# Altium PCB MecaVac NEW.PcbDoc
Units mm, origin at the board's own origin, x right, y up, seen from the top; angles counter-clockwise.
Board outline 120 x 80 mm, 2 copper layers (Top Layer, Bottom Layer), stack 1.56 mm thick; 84 components, 51 nets, 295 pads, 0 vias.
Unrouted connection lines stored in the file: 224.
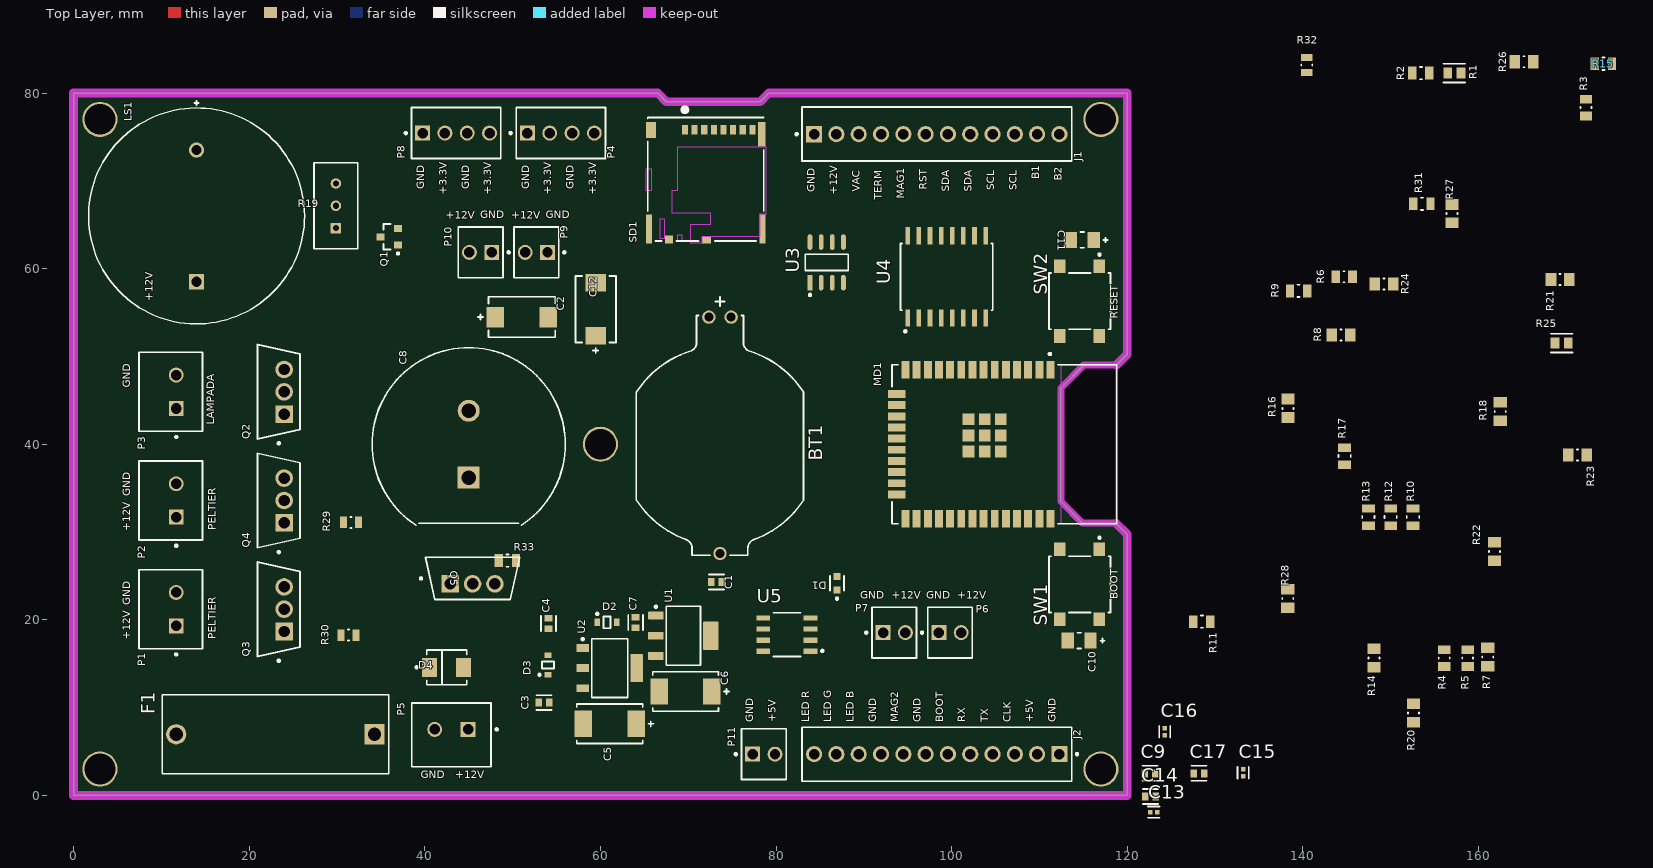
[diagram p0: Top Layer view]
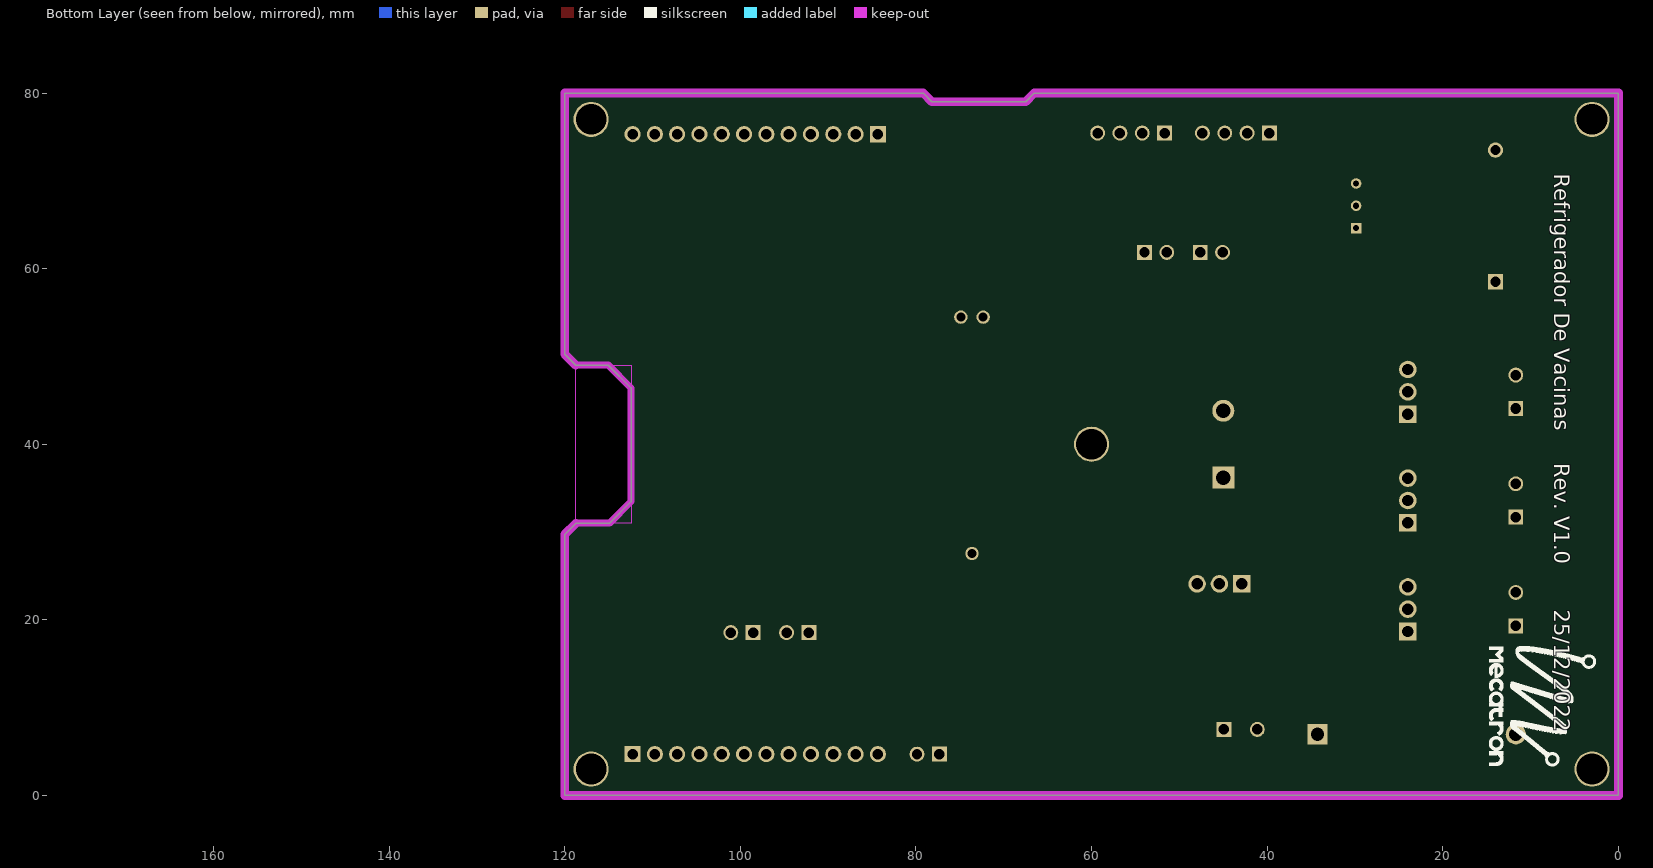
[diagram p1: Bottom Layer view, seen from below]

## Layer stack, top to bottom
Top Solder: solder mask 0.02, Solder Resist, Dk 3.5
Top Layer: signal copper 0.3
Dielectric 1: dielectric 0.96, FR-4, Dk 4.8
Bottom Layer: signal copper 0.3
Bottom Solder: solder mask 0.02, Solder Resist, Dk 3.5

## Board outline
112.45,33.473 114.923,31 118.733,31 120,29.733 120,0 0,0 0,80 66.523,80 67.494,79 78.194,79 79.172,80 120,80 120,50.25 118.75,49 115.04,49 112.45,46.41

## Design rules (kind name [scope] priority, off if disabled: settings)
Clearance [All] p1: gap=0.254 ignorepadtopadclearanceinfootprint=FALSE except(0: Arc-Hole Track-Hole SMDPad-Hole THPad-Hole Via-Hole Fill-Hole Poly-Hole Region-Hole Text-Hole)
PolygonConnect [All] p1: connectstyle=Relief reliefconductorwidth=0.254 reliefentries=4 polygonreliefangle="90 Angle" airgapwidth=0.254
RoutingVias [All] p1: holewidth=1 width=1.3 viastyle="Through Hole" minholewidth=0.3 minwidth=0.7 maxholewidth=2 maxwidth=3
SolderMaskExpansion [All] p1: expansion=0.102 istentingtop=FALSE
Width [All] p1: maxlimit=2.5 minlimit=0.254 preferedwidth=0.9 minimp=50.000000 maximp=50.000000 favimp=50.000000
30 further rules are at their usual default settings.

## Components (designator, comment, footprint, x,y, rotation, side; value= is the part's Value field where it differs from the comment)
BT1 "120591-1" TECO-120591-1-2_V 73.619,41.016 r270 top
C1 "C0603C471J5GACTU" FP-C0603C-CF-MFG 73.228,24.308 r0 top value="470 pF"
C2 "T491D476K025AT" FP-T491D476K025AT-MFG 51.054,54.483 r180 top
C3 "C0603C471J5GACTU" FP-C0603C-CF-MFG 53.569,10.566 r180 top value="470 pF"
C4 "C0603C471J5GACTU" FP-C0603C-CF-MFG 54.077,19.583 r90 top value="470 pF"
C5 "47uF" FP-TAJD-MFG 61.062,8.153 r0 top
C6 "47uF" FP-TAJD-MFG 69.698,11.836 r0 top
C7 "C0603C471J5GACTU" FP-C0603C-CF-MFG 64.008,19.685 r90 top value="470 pF"
C8 "Super Capacitor 1F 5.5V" FP-FR0H105ZF-MFG 45,40 r90 top value=1F
C9 "C0603C104K5RACTU" FP-C0603C-CF-MFG 122.58,2.515 r0 top value="0.10 μF"
C10 "TAJA104K035RNJ" FP-TAJA-MFG 114.529,17.628 r0 top
C11 "TAJA104K035RNJ" FP-TAJA-MFG 114.884,63.271 r0 top
C12 "T491D476K025AT" FP-T491D476K025AT-MFG 59.461,55.372 r270 top
C13 "C0402C105K8PACTU" FP-C0402C105K8PACTU-MFG 123.038,-1.905 r180 top
C14 "C0603C104K5RACTU" FP-C0603C-CF-MFG 122.657,-0.127 r0 top value="0.10 μF"
C15 "C0402C105K8PACTU" FP-C0402C105K8PACTU-MFG 133.198,2.565 r90 top
C16 "C0402C105K8PACTU" FP-C0402C105K8PACTU-MFG 124.282,7.245 r90 top
C17 "C0603C104K5RACTU" FP-C0603C-CF-MFG 128.194,2.515 r0 top value="0.10 μF"
D1 "LTST-C191TBKT" FP-LTST-C191TBKT-MFG 86.944,24.167 r90 top
D2 "BAT54HT1G" ONSC-SOD-323-2-477-02_V 60.757,19.71 r0 top
D3 "BAT54HT1G" ONSC-SOD-323-2-477-02_V 54.026,14.859 r90 top
D4 "TVS-15V" FP-95401-MFG 42.494,14.58 r0 top
F1 "64600001223" FP-64600001223-MFG 22.984,6.96 r180 top
J1 "22-27-2121" FP-22-27-2121-MFG 98.313,75.331 r180 top
J2 "22-27-2121" FP-22-27-2121-MFG 98.313,4.679 r0 top
LS1 "PKB24SPCH3601-B0" FP-PKB24SPCH3601-B0-MFG 14,66 r90 top
MD1 "ESP32-WROOM-32D" FP-ESP32-WROOM-32D-MFG 106,40 r270 top
P1 "Peltier 1" PHOE-1803426_V 11.684,21.209 r90 top
P2 "Peltier 2" PHOE-1803426_V 11.684,33.591 r90 top
P3 "Lâmpada" PHOE-1803426_V 11.684,45.974 r90 top
P4 "22-27-2041" MOLX-22-27-2041_V 55.499,75.438 r180 top
P5 "Power" PHOE-1803426_V 43.028,7.518 r180 top
P6 "22-27-2021" MOLX-22-27-2021_V 99.822,18.542 r0 top
P7 "22-27-2021" MOLX-22-27-2021_V 93.472,18.542 r0 top
P8 "22-27-2041" MOLX-22-27-2041_V 43.561,75.438 r180 top
P9 "22-27-2021" MOLX-22-27-2021_V 52.705,61.849 r180 top
P10 "22-27-2021" MOLX-22-27-2021_V 46.355,61.849 r180 top
P11 "22-27-2021" MOLX-22-27-2021_V 78.613,4.699 r0 top
Q1 "BC846BLT1G" ONSC-SOT-23-3-318-08_V 35.941,63.627 r180 top
Q2 "IRF1404PBF" FP-PG-TO220-3-MFG 23.368,45.974 r180 top
Q3 "IRF1404PBF" FP-PG-TO220-3-MFG 23.368,21.209 r180 top
Q4 "IRF1404PBF" FP-PG-TO220-3-MFG 23.368,33.591 r180 top
Q5 "IRF1404PBF" FP-PG-TO220-3-MFG 45.441,24.715 r90 top
R1 "ERA6AEB102V" FP-ERA6A-IPC_C 157.251,82.271 r0 top
R2 "CRCW0805100KFKEA" FP-CRCW0805-e3-MFG 153.441,82.271 r0 top
R3 "CRCW08054K70FKEA" FP-CRCW0805-e3-IPC_B 172.263,78.337 r270 top
R4 "CRCW08054K70FKEA" FP-CRCW0805-e3-IPC_B 156.108,15.646 r90 top
R5 "CRCW08054K70FKEA" FP-CRCW0805-e3-IPC_B 158.775,15.646 r90 top
R6 "CRCW08054K70FKEA" FP-CRCW0805-e3-IPC_B 144.704,59.08 r0 top
R7 "CRCW080510K0FKEA" FP-CRCW0805-e3-IPC_A 161.061,15.773 r90 top
R8 "CRCW080510K0FKEA" FP-CRCW0805-e3-IPC_A 144.364,52.451 r0 top
R9 "CRCW080547K0FKEA" FP-CRCW0805-e3-MFG 139.522,57.455 r0 top
R10 "CRCW080547K0FKEA" FP-CRCW0805-e3-MFG 152.552,31.699 r270 top
R11 "CRCW080547K0FKEA" FP-CRCW0805-e3-MFG 128.499,19.787 r180 top
R12 "CRCW080547K0FKEA" FP-CRCW0805-e3-MFG 150.012,31.699 r270 top
R13 "CRCW0805220RFKEA" FP-CRCW0805-e3-MFG 147.472,31.699 r270 top
R14 "CRCW080510K0FKEA" FP-CRCW0805-e3-IPC_A 148.107,15.646 r90 top
R15 "CRCW0805220RFKEA" FP-CRCW0805-e3-MFG 174.244,83.337 r180 top
R16 "CRCW080510K0FKEA" FP-CRCW0805-e3-IPC_A 138.328,44.094 r270 top
R17 "CRCW0805220RFKEA" FP-CRCW0805-e3-MFG 144.755,38.633 r270 top
R18 "CRCW080510K0FKEA" FP-CRCW0805-e3-IPC_A 162.484,43.739 r270 top
R19 "3296W-1-202LF" FP-3296W-MFG 29.87,67.158 r0 top
R20 "CRCW080510K0FKEA" FP-CRCW0805-e3-IPC_A 152.603,9.389 r90 top
R21 "CRCW080510K0FKEA" FP-CRCW0805-e3-IPC_A 169.316,58.75 r180 top
R22 "CRCW080510K0FKEA" FP-CRCW0805-e3-IPC_A 161.823,27.762 r90 top
R23 "CRCW080510K0FKEA" FP-CRCW0805-e3-IPC_A 171.298,38.76 r0 top
R24 "CRCW080510K0FKEA" FP-CRCW0805-e3-IPC_A 149.25,58.242 r180 top
R25 "ERA6AEB102V" FP-ERA6A-IPC_C 169.494,51.511 r180 top
R26 "CRCW080510K0FKEA" FP-CRCW0805-e3-IPC_A 165.176,83.566 r0 top
R27 "CRCW080510K0FKEA" FP-CRCW0805-e3-IPC_A 156.997,66.254 r270 top
R28 "CRCW080510K0FKEA" FP-CRCW0805-e3-IPC_A 138.278,22.428 r270 top
R29 "CRCW080530R0JNEA" FP-CRCW0805-e3-IPC_C 31.572,31.09 r180 top
R30 "CRCW080530R0JNEA" FP-CRCW0805-e3-IPC_C 31.318,18.263 r0 top
R31 "CRCW0805100KFKEA" FP-CRCW0805-e3-MFG 153.568,67.386 r0 top
R32 "CRCW0805220KFKEA" FP-CRCW0805-e3-IPC_C 140.462,83.21 r270 top
R33 "CRCW0805100KFKEA" FP-CRCW0805-e3-MFG 49.403,26.746 r0 top
SD1 "503398-1892" MOLX-503398-1892_V 72,69.53 r0 top
SW1 "BOOT" FP-B3S-1000P-MFG 114.59,24.046 r270 top
SW2 "RESET" FP-B3S-1000P-MFG 114.59,56.299 r270 top
U1 "LM1117IMP-3.3/NOPB" DCY0004A_N 69.444,18.186 r0 top
U2 "LM1117MPX-5.0/NOPB" DCY0004A_L 61.062,14.503 r0 top
U3 "AT24C32D-SSHM-T" FP-C04-057-SN-IPC_C 85.776,60.711 r90 top
U4 "DS3231SN#T&R" FP-W16-H2-MFG 99.441,59.055 r90 top
U5 "TC4424AVOA713" FP-C04-057-OA-MFG 81.229,18.313 r180 top

## Footprints (in the part's own frame and the unit in brackets; to place one, negate y for a bottom-side part, rotate by r counter-clockwise, add the part's x,y. Pads: shape width x height; smd on the part's side, far side on the other; paste and mask are expansions set on the pad)
DCY0004A_L [mm] "SOT223, 4-Leads, Body 6.7x3.7mm, Pitch 2.3mm, IPC High Density"
  rrect11% 1.45x0.9 smd: 1(-3.075,2.3) 2(-3.075,0) 3(-3.075,-2.3)
  rrect7% 1.45x3.15 smd: 4(3.075,0)
  silkscreen extent -3.2,-3.35 2.05,3.42, body extent -3.5,-3.25 3.5,3.25, height 1.62
DCY0004A_N [mm] "SOT223, 4-Leads, Body 6.7x3.7mm, Pitch 2.3mm, IPC Medium Density"
  rrect11% 1.75x0.9 smd: 1(-3.125,2.3) 2(-3.125,0) 3(-3.125,-2.3)
  rrect6% 1.75x3.2 smd: 4(3.125,0)
  silkscreen extent -3.25,-3.35 1.95,3.42, body extent -3.5,-3.25 3.5,3.25, height 1.62
FP-22-27-2121-MFG [mm]
  rect 1.84x1.84 hole 1.19 paste-1000 mask+0: 1(13.97,0.02)
  round 1.84 hole 1.19 paste-1000 mask+0: 2(11.43,0.02) 3(8.89,0.02) 4(6.35,0.02) 5(3.81,0.02) 6(1.27,0.02) 7(-1.27,0.02) 8(-3.81,0.02) 9(-6.35,0.02) 10(-8.89,0.02) 11(-11.43,0.02) 12(-13.97,0.02)
  silkscreen extent -15.37,-3.07 16.09,3.08, body extent -15.47,-3.18 15.47,3.18, height 0.25
FP-3296W-MFG [mm]
  rect 1.2x1.2 hole 0.7 paste-1000 mask+0: 1(0.005,-2.54)
  round 1.2 hole 0.7 paste-1000 mask+0: 2(0.005,0) 3(0.005,2.54)
  silkscreen extent -2.48,-4.89 2.48,4.89, body extent -2.58,-4.99 2.58,4.99, height 0.25
FP-95401-MFG [mil]
  rect 67.5x86 smd paste+0 mask+0: 1(-76.25,0) 2(76.25,0)
  silkscreen extent -140,-78 90,78, body extent -114,-81 114,81, height 10
FP-64600001223-MFG [mm]
  rect 2.3x2.3 hole 1.5 paste-1000 mask+0: 1(-11.3,0)
  round 2.3 hole 1.5 paste-1000 mask+0: 2(11.3,0)
  silkscreen extent -12.9,-4.5 12.9,4.5, body extent -13,-4.6 13,4.6, height 0.25
FP-B3S-1000P-MFG [mm]
  rect 1.55x1.3 smd paste+0 mask+0: 1(-3.975,2.25) 2(3.975,2.25) 3(-3.975,-2.25) 4(3.975,-2.25)
  silkscreen extent -5.42,-3.5 3.2,3.5, body extent -4.85,-3.6 4.85,3.6, height 0.25
FP-C04-057-OA-MFG [mm]
  rect 1.55x0.6 smd paste+0 mask+0: 1(-2.7,1.905) 2(-2.7,0.635) 3(-2.7,-0.635) 4(-2.7,-1.905) 5(2.7,-1.905) 6(2.7,-0.635) 7(2.7,0.635) 8(2.7,1.905)
  silkscreen extent -4.18,-2.5 1.55,2.5, body extent -3.57,-2.75 3.57,2.75, height 0.25
FP-C04-057-SN-IPC_C [mm]
  rect 1.777x0.542 smd paste+0 mask+0: 1(-2.318,1.905)
  rrect100% 1.777x0.542 smd paste+0 mask+0: 2(-2.318,0.635) 3(-2.318,-0.635) 4(-2.318,-1.905) 5(2.318,-1.905) 6(2.318,-0.635) 7(2.318,0.635) 8(2.318,1.905)
  silkscreen extent -3.83,-2.45 0.93,2.45, body extent -3.31,-2.55 3.31,2.55, height 0.25
FP-C0402C105K8PACTU-MFG [mm]
  rect 0.52x0.52 smd paste+0 mask+0: 1(-0.4,0) 2(0.4,0)
  silkscreen extent -0.67,-0.64 0.67,0.64, body extent -0.8,-0.4 0.8,0.4, height 0.25
FP-C0603C-CF-MFG [mm]
  rect 0.75x0.9 smd paste+0 mask+0: 1(-0.6,0) 2(0.6,0)
  silkscreen extent -0.87,-0.85 0.88,0.85, body extent -1.2,-0.6 1.2,0.6, height 0.25
FP-CRCW0805-e3-IPC_A [mil]
  rect 47.5x59.38 smd paste+0 mask+0: 1(-41.37,0) 2(41.37,0)
  silkscreen extent -3,-25 3,25, body extent -85,-49 85,49, height 10
FP-CRCW0805-e3-IPC_B [mm]
  rect 1.007x1.408 smd paste+0 mask+0: 1(-0.951,0) 2(0.951,0)
  silkscreen extent -0.07,-0.62 0.07,0.62, body extent -1.7,-0.95 1.7,0.95, height 0.25
FP-CRCW0805-e3-IPC_C [mil]
  rect 31.75x51.5 smd paste+0 mask+0: 1(-33.5,0) 2(33.5,0)
  silkscreen extent -3,-25 3,25, body extent -53,-31 53,31, height 10
FP-CRCW0805-e3-MFG [mm]
  rect 0.95x1.45 smd paste+0 mask+0: 1(-0.975,0) 2(0.975,0)
  silkscreen extent -0.13,-0.7 0.13,0.7, body extent -1.55,-0.82 1.55,0.82, height 0.25
FP-ERA6A-IPC_C [mm]
  rect 1.005x1.262 smd paste+0 mask+0: 1(-0.751,0) 2(0.751,0)
  silkscreen extent -1.25,-1.07 1.25,1.07, body extent -1.35,-0.77 1.35,0.77, height 0.25
FP-ESP32-WROOM-32D-MFG [mm]
  rect 2x0.9 smd paste+0 mask+0: 1(-8.5,5.26) 2(-8.5,3.99) 3(-8.5,2.72) 4(-8.5,1.45) 5(-8.5,0.18) 6(-8.5,-1.09) 7(-8.5,-2.36) 8(-8.5,-3.63) 9(-8.5,-4.9) 10(-8.5,-6.17) 11(-8.5,-7.44) 12(-8.5,-8.71) 13(-8.5,-9.98) 14(-8.5,-11.25) 25(8.5,-11.25) 26(8.5,-9.98) 27(8.5,-8.71) 28(8.5,-7.44) 29(8.5,-6.17) 30(8.5,-4.9) 31(8.5,-3.63) 32(8.5,-2.36) 33(8.5,-1.09) 34(8.5,0.18) 35(8.5,1.45) 36(8.5,2.72) 37(8.5,3.99) 38(8.5,5.26)
  rect 0.9x2 smd paste+0 mask+0: 15(-5.715,-12.25) 16(-4.445,-12.25) 17(-3.175,-12.25) 18(-1.905,-12.25) 19(-0.635,-12.25) 20(0.635,-12.25) 21(1.905,-12.25) 22(3.175,-12.25) 23(4.445,-12.25) 24(5.715,-12.25)
  rect 1.33x1.33 smd paste+0 mask+0: 39(-2.835,-0.405) 39(-2.835,-2.24) 39(-2.835,-4.075) 39(-1,-0.405) 39(-1,-2.24) 39(-1,-4.075) 39(0.835,-0.405) 39(0.835,-2.24) 39(0.835,-4.075)
  Keep-Out Layer region: -9,6.45 9,6.45 9,12.75 -9,12.75
  Keep-Out Layer region: -9,6.45 9,6.45 9,12.75 -9,12.75
  silkscreen extent -10.4,-12.8 9.05,12.8, body extent -9.6,-13.35 9.6,12.9, height 0.25
FP-FR0H105ZF-MFG [mm]
  rect 2.5x2.5 hole 1.65 paste-1000 mask+0: 1(-3.81,0)
  round 2.5 hole 1.65 paste-1000 mask+0: 2(3.81,0)
  silkscreen extent -9.23,-11 11,11, body extent -11.1,-11.1 11.1,11.1, height 0.25
FP-LTST-C191TBKT-MFG [mm]
  rect 0.8x0.8 smd paste+0 mask+0: 1(-0.75,0) 2(0.75,0)
  silkscreen extent -1.87,-0.8 0.85,0.8, body extent -1.25,-0.55 1.25,0.55, height 0.25
FP-PG-TO220-3-MFG [mm]
  rect 2x2 hole 1.3 paste-1000 mask+0: 1(-0.61,2.54)
  round 2 hole 1.3 paste-1000 mask+0: 2(-0.61,0) 3(-0.61,-2.54)
  silkscreen extent -2.41,-5.37 2.41,6, body extent -2.51,-5.6 2.51,5.6, height 0.25
FP-PKB24SPCH3601-B0-MFG [mm]
  rect 1.75x1.75 hole 1.15 paste-1000 mask+0: 1(-7.5,0)
  round 1.75 hole 1.15 paste-1000 mask+0: 2(7.5,0)
  silkscreen extent -12.3,-12.3 13.1,12.3, body extent -12.4,-12.4 12.4,12.4, height 0.25
FP-T491D476K025AT-MFG [mm]
  rect 1.99x2.33 smd paste+0 mask+0: 1(-3.01,0) 2(3.01,0)
  silkscreen extent -3.8,-2.3 5,2.3, body extent -4.13,-2.42 4.13,2.42, height 0.25
FP-TAJA-MFG [mm]
  rect 1.4x1.8 smd paste+0 mask+0: 1(-1.3,0) 2(1.3,0)
  silkscreen extent -0.22,-0.9 2.9,0.9, body extent -2.1,-1 2.1,1, height 0.25
FP-TAJD-MFG [mm]
  rect 2x3 smd paste+0 mask+0: 1(-3,0) 2(3,0)
  silkscreen extent -3.75,-2.25 4.97,2.25, body extent -4.1,-2.35 4.1,2.35, height 0.25
FP-W16-H2-MFG [mm]
  rect 1.98x0.53 smd paste+0 mask+0: 1(-4.685,4.445) 2(-4.685,3.175) 3(-4.685,1.905) 4(-4.685,0.635) 5(-4.685,-0.635) 6(-4.685,-1.905) 7(-4.685,-3.175) 8(-4.685,-4.445) 9(4.685,-4.445) 10(4.685,-3.175) 11(4.685,-1.905) 12(4.685,-0.635) 13(4.685,0.635) 14(4.685,1.905) 15(4.685,3.175) 16(4.685,4.445)
  silkscreen extent -6.32,-5.25 3.8,5.25, body extent -5.78,-5.43 5.77,5.43, height 0.25
MOLX-22-27-2021_V [mm] "Header, 2-Leads, Body 5.8x5.08mm"
  rect 1.7x1.7 hole 1.19: 1(-1.27,0)
  round 1.7 hole 1.19: 2(1.27,0)
  silkscreen extent -3.31,-2.9 2.54,2.9, body extent -2.54,-2.9 2.54,2.9, height 11.72
MOLX-22-27-2041_V [mm] "CONN, 4-Leads, Body 10.16x5.8mm, Pitch 2.54mm"
  rect 1.7x1.7 hole 1.19: 1(3.81,0)
  round 1.7 hole 1.19: 2(1.27,0) 3(-1.27,0) 4(-3.81,0)
  silkscreen extent -5.08,-2.9 5.85,2.9, body extent -5.08,-2.9 5.08,2.9, height 11.7
MOLX-503398-1892_V [mm] "CONN, 8-Leads, Body 14.05x13.2mm, Pitch 1.1mm"
  rect 0.7x1.1 smd: 1(-2.38,6.27) 2(-1.28,6.27) 3(-0.18,6.27) 4(0.92,6.27) 5(2.02,6.27) 6(3.12,6.27) 7(4.22,6.27) 8(5.32,6.27)
  rect 1.05x0.78 smd: 9(0.095,-6.27)
  rect 0.9x0.93 smd: 10(-4.17,-6.195)
  rect 0.86x2.8 smd: 11(6.4,5.77)
  rect 0.7x3.3 smd: 12(6.48,-5.01) 13(-6.48,-5.01)
  rect 1.14x1.83 smd: 14(-6.26,6.255)
  Top Layer keep-out region: -3.22,-6.28 -2.67,-6.28 -2.67,-5.73 -3.22,-5.73
  Top Layer keep-out region: -5.235,-6.08 -4.685,-6.08 -4.685,-3.93 -5.235,-3.93
  Top Layer keep-out region: -6.83,-0.63 -6.13,-0.63 -6.13,1.77 -6.83,1.77
  Top Layer keep-out region: 6.83,4.37 6.83,-3.36 6.13,-3.36 6.13,-5.88 -0.43,-5.88 -0.43,-6.66 -1.73,-6.66 -1.73,-4.48 0.57,-4.48 0.57,-3.23 -3.82,-3.23 -3.82,-0.63 -3.17,-0.63 -3.17,4.37
  silkscreen extent -6.6,-6.38 6.6,8.82, body extent -6.55,-6.38 6.55,7.67, height 1.28
ONSC-SOD-323-2-477-02_V [mm] "SOD, 2-Leads, Body 1.7x1.25mm"
  rect 0.63x0.83 smd: 1(-1.115,0) 2(1.115,0)
  silkscreen extent -1.24,-0.67 0.4,1.09, body extent -0.85,-0.63 0.85,0.63, height 1.06
ONSC-SOT-23-3-318-08_V [mm] "SOT23, 3-Leads, Body 2.92x1.3mm, Pitch 0.95mm"
  rect 0.9x0.8 smd: 1(-1,0.95) 2(-1,-0.95) 3(1,0)
  silkscreen extent -1.13,-1.46 0.65,2.02, body extent -0.65,-1.46 0.65,1.46, height 1.11
PHOE-1803426_V [mm] "THD, 2-Leads, Body 9.01x7.25mm, Pitch 3.81mm"
  rect 1.7x1.7 hole 1.2: 1(-1.905,0)
  round 1.7 hole 1.2: 2(1.905,0)
  silkscreen extent -5.28,-3 4.5,4.25, body extent -4.5,-3 4.51,4.25, height 9.2
TECO-120591-1-2_V [mm] "Lithium Battery Holder"
  round 1.52 hole 1.02: 1(-13.46,-1.27) 1(-13.46,1.27) 2(13.46,0)
  silkscreen extent -15.74,-9.53 13.65,9.53, body extent -13.65,-9.52 13.66,9.52, height 6.41

## Part data
BT1: library part CMP-0438-00001-2, "Lithium Battery Holder for CR2032 3V Cell", Manufacturer="TE Connectivity", AccessRights=2147483647, Body Shape="Horizontal Cylindrical", ComponentLink1Description="Manufacturer URL", ComponentLink1URL=http://www.te.com/, ComponentLink2Description=Datasheet, ComponentLink2URL=http://www.te.com/commerce/DocumentDelivery/DDEController?Action=showdoc&DocId=Customer+Drawing%7F120591%7FH%7Fpdf%7FEnglish%7FENG_CD_120591_H.pdf%7F120591-1, ContentType="Unified Component", ContentTypeGUID=CB3C11C4-E317-11DF-B822-12313F0024A2, DatasheetVersion="Rev. H, 01/2013", Folder="Unified Components\Components\TE Connectivity\Connectors & Connector Components\Power Products\Battery Interconnection Products\", FolderGUID=A6761B51-D489-48A3-9180-F4808F45AB79, ItemGUID=B2C50140-681E-4F62-8DBB-9728605318CE, ItemHRID=CMP-0438-00001, LifeCycle=Released, LifeCycleStateGUID=61E382EE-6656-4F12-9E24-BE9327104A25, Mounting Technology="Through Hole", PackageDescription="Lithium Battery Holder", PackageReference=120591-1, Packing Type=Tray, PartNumber=120591-1, ReleaseDate="20/08/2013 02:50:22 AM", RevisionId=1
C1 C7: library part CMP-2006-03581-2, "CAP CER 470PF 50V 5% NP0 0603", Capacitance="470 pF", Capacitancia=470pF, Manufacturer=KEMET, Package=C0603C-CF, Temperature="-55°C to +125°C", Temperature Characteristic=C0G, Temperature Coefficient=30ppm/°C, Temperature Range High=+125°C, Temperature Range Low=-55°C, Tolerance=0.05, Voltage rating="50 V", Automotive=Yes, Automotive Grade="Grade 1", Category=Cap, ComponentLink2Description=Datasheet, ComponentLink2URL=https://api.kemet.com/component-edge/download/datasheet/C0603C100J5GACAUTO.pdf, Device Class L1="Passive Components", Device Class L2=Capacitors, Device Class L3="Ceramic Capacitors", Digikey Description="CAP CER 470PF 50V 5% NP0 0603", Height=0.87mm, Lead Free=Yes, Manufacturer Part Number=C0603C471J5GACTU, Material=Ceramic, Mouser Description="Ceramic Capacitor 470Pf 50V, C0G, 5%, 0603, Full Reel", Octopart=https://octopart.com/c0603c471j5gactu-kemet-95298, RoHS=TRUE
C2 C12: library part CMP-03017-000020-1, "CAP TANT 47UF 10% 25V 2917", Capacitance=47uF, Case Code (Imperial)=2917, Case Code (Metric)=7343, Dielectric Material=Tantalum, ESR (Equivalent Series Resistance)=700mR, Leakage Current=11.8uA, Max Operating Temperature=125°C, Min Operating Temperature=-55°C, Package Quantity=1, Ripple Current=463mA, Tolerance=10%, Voltage=25V, Case/Package=2917, Depth=4.3mm, Dissipation Factor=10%, Failure Rate=0.001%, Features="General Purpose", Height=2.8mm, Height - Seated (Max)=0.122inch, Lead Free="Lead Free", Length=7.3mm, Life (Hours)=2000Hour, Mount="Surface Mount", Number of Pins=2, Packaging="Tape and Reel", Polarity=Polar, Radiation Hardening=No, REACH SVHC="No SVHC", RoHS Compliant=Yes, Termination=SMD/SMT, Voltage rating=25V, Voltage Rating (DC)=25V, Weight=0.023634oz, Width=4.3mm
C3 C4: library part CMP-2006-03581-2, "CAP CER 470PF 50V 5% NP0 0603", Capacitance="470 pF", Manufacturer=KEMET, Package=C0603C-CF, Temperature="-55°C to +125°C", Temperature Characteristic=C0G, Temperature Coefficient=30ppm/°C, Temperature Range High=+125°C, Temperature Range Low=-55°C, Tolerance=0.05, Voltage rating="50 V", Automotive=Yes, Automotive Grade="Grade 1", Category=Cap, ComponentLink2Description=Datasheet, ComponentLink2URL=https://api.kemet.com/component-edge/download/datasheet/C0603C100J5GACAUTO.pdf, Device Class L1="Passive Components", Device Class L2=Capacitors, Device Class L3="Ceramic Capacitors", Digikey Description="CAP CER 470PF 50V 5% NP0 0603", Height=0.87mm, Lead Free=Yes, Manufacturer Part Number=C0603C471J5GACTU, Material=Ceramic, Mouser Description="Ceramic Capacitor 470Pf 50V, C0G, 5%, 0603, Full Reel", Octopart=https://octopart.com/c0603c471j5gactu-kemet-95298, RoHS=TRUE
C5 C6: library part CMP-04424-000452-1, "47uF 10V  ±10% 400mΩ 2917  SMD Tantalum Capacitor", Case Code (Imperial)=2917, Case Code (Metric)=7343, Dielectric Material=Tantalum, ESR (Equivalent Series Resistance)=900mR, Leakage Current=6uA, Max Operating Temperature=125°C, Min Operating Temperature=-55°C, Package Quantity=1, Tolerance=10%, Voltage=10V, Capacitance=47uF, Case/Package=2917, Construction=Flat, Depth=4.3mm, Dissipation Factor=6%, Features="General Purpose", Height=2.9mm, Height - Seated (Max)=0.122inch, Lead Free="Lead Free", Lead Pitch=4.4mm, Length=7.3mm, Mount="Surface Mount", Number of Pins=2, Packaging="Tape and Reel", Polarity=Polar, Radiation Hardening=No, REACH SVHC="No SVHC", RoHS Compliant=Yes, Series=TAJ, Termination=SMD/SMT, Voltage rating=10V, Voltage Rating (DC)=10V, Width=0.169inch
C8: library part CMP-03024-000003-1, "CAP 1F -20% +80% 5.5V T/H", Capacitance=1F, Manufacturer=KEMET, Manufacturer Part Number=FR0H105ZF, Temperature="-40°C to +85°C", Temperature Range High=+85°C, Temperature Range Low=-40°C, Tolerance=-20/+80%, Voltage rating=5.5V, Automotive=No, Category=Cap, ComponentLink2Description=Datasheet, ComponentLink2URL=https://content.kemet.com/datasheets/KEM_S6016_FR.pdf, Device Class L1="Passive Components", Device Class L2=Capacitors, Device Class L3=Supercapacitors, Digikey Description="CAP 1F -20% +80% 5.5V T/H", Height=22mm, Lead Free=Yes, Mouser Description="Supercapacitors / Ultracapacitors 1F 5.5volts Radial Super Cap", Octopart=https://octopart.com/fr0h105zf-kemet-30531656, Package=FR0H105ZF, RoHS=TRUE
C9 C14 C17: library part CMP-2006-03061-2, "CAP CER 0.1UF 50V X7R 0603", Capacitance="0.10 μF", Manufacturer=KEMET, Package=C0603C-CF, Temperature="-55°C to +125°C", Temperature Characteristic=X7R, Temperature Coefficient=30ppm/°C, Temperature Range High=+125°C, Temperature Range Low=-55°C, Tolerance=0.1, Voltage rating="50 V", Automotive=Yes, Automotive Grade="Grade 1", Category=Cap, ComponentLink2Description=Datasheet, ComponentLink2URL=https://api.kemet.com/component-edge/download/datasheet/C0603C100J5GACAUTO.pdf, Device Class L1="Passive Components", Device Class L2=Capacitors, Device Class L3="Ceramic Capacitors", Digikey Description="CAP CER 0.1UF 50V X7R 0603", Height=0.87mm, Lead Free=Yes, Manufacturer Part Number=C0603C104K5RACTU, Material=Ceramic, Octopart=https://octopart.com/c0603c104k5ractu-kemet-139244, RoHS=TRUE
C10 C11: library part CMP-04424-000673-1, "100nF 35V  ±10% 24Ω 1206  SMD Tantalum Capacitor", Capacitance=100nF, Case Code (Imperial)=1206, Case Code (Metric)=3216, Dielectric Material=Tantalum, ESR (Equivalent Series Resistance)=24R, Leakage Current=500nA, Max Operating Temperature=125°C, Min Operating Temperature=-55°C, Package Quantity=1, Tolerance=10%, Voltage=35V, Case/Package=1206, Construction=Flat, Depth=1.6mm, Dissipation Factor=4%, Features="General Purpose", Height=1.6mm, Height - Seated (Max)=0.071inch, Lead Free="Lead Free", Lead Pitch=1.1mm, Length=3.2mm, Mount="Surface Mount", Number of Pins=2, Packaging="Tape and Reel", Polarity=Polar, Q Factor=4, Radiation Hardening=No, REACH SVHC="No SVHC", RoHS Compliant=Yes, Series=TAJ, Termination=SMD/SMT, Voltage rating=35V, Voltage Rating (DC)=35V, Width=1.6mm
C13 C15 C16: library part CMP-2008-02081-2, "CAP CER 1UF 10V X5R 0402", Capacitance=1uF, Case Code (Imperial)=0402, Case Code (Metric)=1005, Dielectric=X5R, Dielectric Material=Ceramic, Max Operating Temperature=85°C, Min Operating Temperature=-55°C, Package Quantity=1, Tolerance=10%, Voltage=10V, Case/Package=0402, Construction=Flat, Contact Plating=Tin, Depth=0.5mm, Dissipation Factor=5%, Height=0.5mm, Lead Free="Lead Free", Length=1mm, Mount="Surface Mount", Number of Pins=2, Packaging="Tape and Reel", Radiation Hardening=No, REACH SVHC="No SVHC", RoHS Compliant=Yes, Series=C, Termination=SMD/SMT, Thickness=0.022inch, Voltage rating=10V, Voltage Rating (DC)=10V, Width=0.5mm
D1: library part CMP-22017-000008-1, "LED BLUE CLEAR CHIP SMD", Case Code (Imperial)=0603, Case Code (Metric)=1608, Color=Blue, Forward Current=20mA, Forward Voltage=3.8V, Lens Color=Colorless, Max Operating Temperature=80°C, Max Power Dissipation=75mW, Min Operating Temperature=-20°C, Package Quantity=1, Power Dissipation=76mW, Reverse Voltage=5V, Case/Package=0603, Depth=1.6mm, Dominant Wavelength=475nm, Height=0.55mm, Illumination Color=Blue, Lead Free="Lead Free", Length=0.8mm, Lens Style=Diffused, Lens Transparency=Clear, Luminous Intensity=180mcd, Mount="Surface Mount", Number Of Elements=1, Number of LEDs=1, Number of Pins=2, Packaging="Tape and Reel", Radiation Hardening=No, Test Current=20mA, Viewing Angle=130°, Wavelength=468nm, Width=0.8mm
D2 D3: library part CMP-1055-00462-1, "Schottky Barrier Diode, 2-Pin SOD-323, Pb-Free, Tape and Reel", Manufacturer="On Semiconductor", ComponentLink1Description="Manufacturer URL", ComponentLink1URL=http://www.onsemi.com/, ComponentLink2Description=Datasheet, ComponentLink2URL=http://www.onsemi.cn/pub_link/Collateral/BAT54HT1-D.PDF, ComponentLink3Description="Package Specification", ComponentLink3URL=http://www.onsemi.com/pub_link/Collateral/477-02.PDF.1, Configuration=Single, DatasheetVersion="Rev. 6", IFSM Max (A)=0.6, Mounting Technology="Surface Mount", PackageDescription="2-Pin SOD, Body 1.7 x 1.25 mm", PackageReference=SOD-323-2-477-02, PackageVersion="Rev. H, 03/2007", Packing="Tape and Reel", PartNumber=BAT54HT1G, RoHS=TRUE, trr Max (ns)=5
D4: library part CMP-02577-000009-1, "TVS DIODE 15V 24.4V DO214AA", Breakdown Voltage=16.7V, Clamping Voltage=24.4V, Manufacturer=Vishay, Manufacturer Part Number=SMBJ15A-E3/52, Max Junction Temp=+150°C, Package=95401, Peak Pulse Current=24.6A, Peak Pulse Power=600W, Reverse Standoff Voltage=15V, Temperature="-55°C to +150°C", Temperature Range Low=-55°C, Automotive=No, Category=Diode, ComponentLink2Description=Datasheet, ComponentLink2URL=https://www.vishay.com/docs/88392/smbj.pdf, Device Class L1="Circuit Protection", Device Class L2="TVS Diodes", Device Class L3=unset, Digikey Description="TVS DIODE 15V 24.4V DO214AA", Direction=Unidirectional, Footprint Url=https://www.vishay.com/docs/95401/smb.pdf, Height=2.44mm, Lead Free=Yes, Mouser Description="TVS Diodes - Transient Voltage Suppressors 600W 15V 5% Uni", Number Of Channels=1, Octopart=https://octopart.com/smbj15a-e3%2F52-vishay-39558613, RoHS=TRUE, Standoff Height=0mm, Temperature Range High=+150°C
F1: library part CMP-08604-000020-1, "FUSE BLOCK CART 250V 6.3A PCB", Fuse Current=6.3A, Manufacturer="Littelfuse Inc", Package=0, Voltage Rating Ac=250V, Automotive=No, Category=Fuse, ComponentLink2Description=Datasheet, ComponentLink2URL=https://www.littelfuse.com/~/media/electronics/datasheets/fuse_blocks/littelfuse_fuse_block_646_datasheet.pdf.pdf, Conn Orientation=Horizontal, Device Class L1="Circuit Protection", Device Class L2="Fuse Holders", Device Class L3=unset, Digikey Description="FUSE BLOCK CART 250V 6.3A PCB", Height=12mm, Lead Free=Yes, Manufacturer Part Number=64600001223, Mouser Description="Fuse Holder Screw Mount Bulk", Number Of Fuses=1, Octopart=https://octopart.com/64600001223-littelfuse-39645661, RoHS=TRUE, Voltage Rating Dc=250V
J1 J2: library part CMP-04776-000649-1, "CONN HEADER VERT 12POS 2.54MM", Color=Natural, Contact Resistance=10mR, Current rating=4A, Flammability Rating="UL94 V-0", Housing Color=White, Insulation Resistance=50GR, Max Operating Temperature=75°C, Min Operating Temperature=0°C, Package Quantity=10, Voltage rating=250V, Connector Type="Male Pin", Contact Gender=Male, Contact material=Brass, Contact Mating Length=0.295inch, Contact Plating=Tin, Contact Type="Male Pin", Depth=5.8mm, Fastening Type=Friction, Gender=Male, Glow Wire Compliant=Non-compliant, Halogen Free="Low Halogen", Height=11.7mm, Hole Diameter=1.02mm, Housing material=Nylon, Lead Free="Lead Free", Lead Pitch=2.54mm, Length=30.48mm, Material=Nylon, Mount="Through Hole", Number of Circuits=12, Number Of Contacts=12, Number of Lines=1, Number of Poles=12, Number of Positions=12, Number Of Rows=1, Orientation=Straight, Packaging=Bulk, Pitch=2.54mm, Radiation Hardening=No, RoHS Compliant=Yes, Series=KK, Termination=Solder, Voltage Rating (AC)=250V, Voltage Rating (DC)=250V, Working Voltage=250V
LS1: library part CMP-06203-000001-2, "AUDIO PIEZO TRANSDUCER 3-15V TH", Frequency=3.6kHz, Max Frequency=4.1kHz, Max Operating Temperature=70°C, Max Supply Current=16mA, Max Supply Voltage=15V, Min Operating Temperature=-20°C, Min Supply Voltage=3V, Nominal Supply Voltage (DC)=12V, Package Quantity=650, Diameter=24.3mm, Height=9.7mm, Lead Free="Lead Free", Length=24.3mm, Max Supply Voltage (DC)=15V, Min Supply Voltage (DC)=3V, Mount=Flush, Nominal Supply Current=16mA, Operating Supply Current=16mA, Packaging=Bulk, Radiation Hardening=No, REACH SVHC="No SVHC", Self Resonant Frequency=3.6kHz, Termination="PC Pins", Voltage rating=12V, Voltage Rating (DC)=15V, Washable=No
MD1: library part CMP-194065-000003-1, "WIFI MODULE 32MBITS SPI FLASH", Manufacturer="Espressif Systems", Max Frequency=2484MHz, Max Supply Voltage=3.6V, Min Supply Voltage=3V, Nominal Supply Current=500mA, Temperature="-40°C to +85°C", Temperature Range High=+85°C, Temperature Range Low=-40°C, Automotive=No, Bandwidth=72MHz, Category=UNK, ComponentLink2Description=Datasheet, ComponentLink2URL=https://www.espressif.com/sites/default/files/documentation/esp32-wroom-32d_esp32-wroom-32u_datasheet_en.pdf, Data Rate=150Mbits/s, Device Class L1="Integrated Circuits (ICs)", Device Class L2="RF Semiconductors and Devices", Device Class L3=Transceivers, Digikey Description="WIFI MODULE 32MBITS SPI FLASH", Height=3.2mm, Interface=I2C,SPI,UART,Ethernet,I2S,Other, Lead Free=Yes, Manufacturer Part Number=ESP32-WROOM-32D, Mouser Description="Wi-Fi/BT BLE Module ESP32-D0WD, SPI Flash, UART, P", Number Of Adc Channels=16, Number Of Gpio=32, Octopart=https://octopart.com/esp32-wroom-32d-espressif+systems-91040050, Package=ESP32-WROOM-32D, RoHS=TRUE, Sensitivity=-98dBm
P1 P2 P3 P5: library part CMP-2000-05826-1, "Male Header, Pitch 3.81 mm, 1 x 2 Position, Height 9.2 mm, Tail Length 3.4 mm", Manufacturer="Phoenix Contact", Package Description="Male Header, Pitch 3.81 mm, 1 x 2 Position, Height 9.2 mm", Package Reference=1803426, Datasheet URL=https://www.phoenixcontact.com/online/portal/cn/pxc/product_detail_page/!ut/p/b1/3VfHjrNIGHyWeQDG5HAkm5zjxQIM2AQDNvnp1zNa7WFX889l5YPpA6L1qUtVdFX3d4gPEYCiFAaBJHgID_Etma9lMl67W9J8fcf4iRJ1HIRRHAIZDANpTKVtR3IFAyUOwSEE0ZNTbb2iOquuOqg8OKsEReRD0XpT8cAJtHK1h62gd5Lwwj7fSR7gfNZiWNE2tu2Xg71pvaHw3VHbDIccysUbixteZxggMWJnxWgP9KIolKko13HrKNI0OD69xjcsLwZb9oJmcNi4flh1xw9LW6-eWTQ9nREGMg82nQ7i5d6Jdk07dw7fZbrokLagaoyYggEvB4C7H5W4HERjSAam7I1pSvC1iqzSu8itk8CidtE6n3bP2nD0Pp6iRD-LQiLob5pFzwLixwIWO7iH0PcgleukhedgldkYbrFLA5WSM7ufG5_qGPkUc9vEzZQaS901mlWkPYn5tWxhabkCUfW4SsSIbpPuMIJHpQReslhERyEnqVrZBIU1V5Nilrs5X123FVtC3BVOSLHMP1b6PfXsNSgk1T-F50SEmtzqQUXqhsW5rwQ1o0BXB2gELrcQ4gCUoNAFTBX6N2LEmxJz0Hclhr8rsXf1mPOuHoPf1WPwu3oMflePSW-7Fd81PGj4i1jqc2r6kGnO3K4b7QxsE14hAduG8C7FaT2GvZ7I-s0j05SGAI1kaO9y99Mt55acg9cLDNYaWwQcdDTPAtjrfMY1OBkOcVEr9HZ8tGspIQLbIVDtpjctgzHFMG4BAZsGvQthBBH4WA-nFo17BJ08nhvnnSIvtClxxDZLZLDt43EXgXAD-FUl6xp1LReX8w3Sb-3dEFiLergsTPmiPWlKHKTnUE9MvjMWis8MoKAxhXcLRQoyR1OjaJFnuS2q9AQSlWi71_PQS1I7hwNcTAR9vGjIY_k4yIf4mrafS9Z-gp_9mn329-4, Datasheet Version=02/2015, Manufacturer URL=http://www.phoenixcontact.com/, Mounting Technology=ThroughHole
P4 P8: library part CMP-2000-05243-1, "Male Header, Pitch 2.54 mm, 1 x 4 Position, Height 11.7 mm, Tail Length 3.56 mm, RoHS, Bulk", Current rating=4A, Manufacturer=Molex, Operating temperature=0degCto+75degC, Voltage rating=250V, Contact material=Tinplatedbrass, Datasheet URL=http://www.molex.com/pdm_docs/sd/022272041_sd.pdf, Datasheet Version="Rev. F, 06/2009", Housing material=Nylon(UL94V-0), Manufacturer URL=http://www.molex.com/
P6 P7 P9 P10 P11: library part CMP-2000-05537-1, "Male Header, Pitch 2.54 mm, 1 x 2 Position, Height 11.7 mm, Tail Length 3.56 mm, 0 to 75 degC, RoHS, Bulk", Current - Max=4A, Manufacturer=Molex, Operating temperature=0°Cto+75°C, Package Description="2-Leads Header, Body 5.08 x 5.8 mm, Pitch 2.54 mm", Package Version="Rev. BC, 02/2012", PartNumber=0022272021, Voltage - Max=250V, Contact material=Tinplatedbrass, Current rating=4A, Datasheet URL=http://www.molex.com/pdm_docs/sd/022272021_sd.pdf, Datasheet Version="Rev. F, 06/2009", Housing material=Nylon(UL94V-0), Manufacturer URL=http://www.molex.com/, Mounting Technology=ThroughHole, No. of Positions=2, No. of Rows=1, Orientation=Vertical, Package Reference=22-27-2021, Pitch=2.54mm, Voltage rating=250V
Q1: library part CMP-1048-00779-1, "General Purpose Transistor, NPN Silicon, 3-Pin SOT-23, Pb-Free, Tape and Reel", Manufacturer="On Semiconductor", ComponentLink1Description="Manufacturer URL", ComponentLink1URL=http://www.onsemi.com/, ComponentLink2Description=Datasheet, ComponentLink2URL=http://www.onsemi.cn/pub_link/Collateral/BC846ALT1-D.PDF, ComponentLink3Description="Package Specification", ComponentLink3URL=http://www.onsemi.cn/pub_link/Collateral/318-08.PDF, DatasheetVersion="Rev. 11", fT Min (MHz)=100, IC Continuous (A)=0.1, Mounting Technology="Surface Mount", PackageDescription="3-Pin Small Outline Transistor, Body 2.92 x 1.3 mm, Pitch 0.95 mm", PackageReference=SOT-23-3-318-08, PackageVersion="Rev. AP, 11/2009", Packing="Tape and Reel", PartNumber=BC846BLT1G, Polarity=NPN, RoHS=TRUE
Q2 Q3 Q4 Q5: library part CMP-32901-000149-1, "MOSFET N-CH 40V 202A TO-220AB", Continuous Drain Current=202A, Drain To Source Breakdown Voltage=40V, Drain To Source Resistance=0.0035Ω, Gate To Source Voltage=20V, Input Capacitace At Vds="5669pF @ 25V", Manufacturer="Infineon Technologies", Max Forward Diode Voltage=1.5V, Max Junction Temp=+175°C, Package=PG-TO220-3, Power Dissipation=333W, Pulse Drain Current=808A, Temperature="-55°C to +175°C", Temperature Range Low=-55°C, Automotive=No, Category=Trans, ComponentLink2Description=Datasheet, ComponentLink2URL=https://www.infineon.com/dgdl/irf1404pbf.pdf?fileId=5546d462533600a4015355dae92618b0, Depletion Mode=False, Device Class L1="Discrete Semiconductors", Device Class L2=Transistors, Device Class L3=MOSFETs, Digikey Description="MOSFET N-CH 40V 202A TO-220AB", Drain To Source Voltage=40V, Footprint Url=https://www.infineon.com/dgdl/po-to220ab-fp.pdf?fileId=5546d462580663ef0158068cfbee01be, Gate Charge At Vgs="131nC @ 10V", Height=19.8mm, Lead Free=Yes, Manufacturer Part Number=IRF1404PBF, Number Of Channels=1, Number Of N Channels=1, Octopart=https://octopart.com/irf1404pbf-infineon-65873280, Reverse Recovery Charge=163nC, Reverse Recovery Time=78ns, RoHS=TRUE, Rthja Max=62°C/W, Standoff Height=3.37mm, Temperature Range High=+175°C, Threshold Vgs Max=4V, Threshold Vgs Min=2V, Transconductance=76S, Turn Off Delay Time=46ns, Turn On Delay Time=17ns
R1 R25: library part CMP-2001-00581-2, "RES 1K OHM 0.1% 1/8W 0805", Case Code (Imperial)=0805, Case Code (Metric)=2012, Max Operating Temperature=155°C, Max Power Dissipation=125mW, Min Operating Temperature=-55°C, Package Quantity=5000, Resistance=1kR, Resistance Tolerance=0.1%, Resistor Type="Thin Film", Temperature Coefficient=25ppm/°C, Voltage rating=100V, Case/Package=0805, Construction=Rectangular, Contact Plating=Tin, Depth=1.25mm, Height=0.5mm, Length=2mm, Military Standard=Not, Mount="Surface Mount", Number of Pins=2, Number of Terminations=2, Packaging="Tape and Reel", Power Rating=125mW, Radiation Hardening=No, REACH SVHC="No SVHC", RoHS Compliant=Yes, Series=ERA-6A, Technology="THIN FILM", Termination=SMD/SMT, Tolerance=0.1%, Width=1.25mm, Working Voltage=100V
R2 R31 R33: library part CMP-2001-04899-2, "RES Thick Film, 100kΩ, 1%, 0.125W, 100ppm/°C, 0805", Case Code (Imperial)=0805, Case Code (Metric)=2012, Max Operating Temperature=155°C, Min Operating Temperature=-55°C, Package Quantity=5000, Power Rating=125mW, Resistance=100kR, Temperature Coefficient=100ppm/°C, Tolerance=1%, Voltage rating=150V, Case/Package=0805, Composition="Thick Film", Contact Plating=Tin, Depth=1.25mm, Height=0.45mm, Lead Free="Lead Free", Length=2mm, Military Standard=Not, Mount="Surface Mount", Number of Pins=2, Packaging="Tape and Reel", Radiation Hardening=No, Termination=SMD/SMT, Voltage Rating (DC)=150V, Weight=0.000194oz, Width=1.25mm
R3 R4 R5 R6: library part CMP-2100-03615-2, "RES Thick Film, 4.7kΩ, 1%, 0.125W, 100ppm/°C, 0805", Case Code (Imperial)=0805, Case Code (Metric)=2012, Max Operating Temperature=155°C, Max Power Dissipation=125mW, Min Operating Temperature=-55°C, Package Quantity=10, Resistance=4.7kR, Temperature Coefficient=100ppm/°C, Tolerance=1%, Voltage rating=150V, Case/Package=0805, Composition="Thick Film", Contact Plating=Tin, Depth=1.25mm, Features="Automotive AEC-Q200", Height=0.45mm, Lead Free="Lead Free", Length=2mm, Military Standard=Not, Number of Terminations=2, Packaging="Tape and Reel", Power Rating=125mW, Radiation Hardening=No, Termination=SMD/SMT, Voltage Rating (DC)=150V, Weight=0.000194oz, Width=1.25mm
R7 R8 R14 R16 R18 R20 R21 R22 R23 R24 R26 R27 R28: library part CMP-2001-04908-2, "RES Thick Film, 10kΩ, 1%, 0.125W, 100ppm/°C, 0805", Case Code (Imperial)=0805, Case Code (Metric)=2012, Max Operating Temperature=155°C, Min Operating Temperature=-55°C, Package Quantity=5000, Power Rating=125mW, Resistance=10kR, Temperature Coefficient=100ppm/°C, Tolerance=1%, Voltage rating=150V, Case/Package=0805, Composition="Thick Film", Contact Plating=Tin, Depth=1.25mm, Height=0.45mm, Lead Free="Lead Free", Length=2mm, Military Standard=Not, Packaging="Tape and Reel", Radiation Hardening=No, Termination=SMD/SMT, Voltage Rating (DC)=150V, Weight=0.000194oz, Width=1.25mm
R9 R10 R11 R12: library part CMP-2001-03939-2, "RES Thick Film, 47kΩ, 1%, 0.125W, 100ppm/°C, 0805", Case Code (Imperial)=0805, Case Code (Metric)=2012, Max Operating Temperature=155°C, Max Power Dissipation=125mW, Min Operating Temperature=-55°C, Package Quantity=10, Resistance=47kR, Temperature Coefficient=100ppm/°C, Tolerance=1%, Voltage rating=150V, Case/Package=0805, Composition="Thick Film", Contact Plating=Tin, Depth=1.25mm, Features="Automotive AEC-Q200", Height=0.45mm, Lead Free="Lead Free", Length=2mm, Military Standard=Not, Number of Terminations=2, Packaging="Tape and Reel", Power Rating=125mW, Radiation Hardening=No, Termination=SMD/SMT, Voltage Rating (DC)=150V, Weight=0.000194oz, Width=1.25mm, Working Voltage=150V
R13 R15 R17: library part CMP-2001-03682-2, "RES Thick Film, 220Ω, 1%, 0.125W, 100ppm/°C, 0805", Case Code (Imperial)=0805, Case Code (Metric)=2012, Max Operating Temperature=155°C, Max Power Dissipation=125mW, Min Operating Temperature=-55°C, Package Quantity=10, Resistance=220R, Temperature Coefficient=100ppm/°C, Tolerance=1%, Voltage rating=150V, Case/Package=0805, Composition="Thick Film", Contact Plating=Tin, Depth=1.25mm, Features="Automotive AEC-Q200", Height=0.45mm, Lead Free="Lead Free", Length=2mm, Military Standard=Not, Mount="Surface Mount", Number of Terminations=2, Packaging="Tape and Reel", Power Rating=125mW, Radiation Hardening=No, Termination=SMD/SMT, Voltage Rating (DC)=150V, Weight=0.000194oz, Width=0.049inch
R19: library part CMP-2000-05582-2, "TRIMMER 2K OHM 0.5W PC PIN TOP", Color=Blue, Max Operating Temperature=125°C, Max Power Dissipation=500mW, Min Operating Temperature=-55°C, Package Quantity=50, Resistance=2kR, Resistance Tolerance=10%, Resistor Type=Cermet, Temperature Coefficient=100ppm/°C, Contact Plating=Tin, Depth=4.83mm, Height=0.395inch, Lead Free="Lead Free", Length=9.53mm, Military Standard=Not, Mount=Panel, Number of Turns=25, Packaging=Rail/Tube, Power Rating=500mW, Radiation Hardening=No, REACH SVHC="No SVHC", RoHS Compliant=Yes, Series=3296, Taper=Linear, Technology=CERMET, Termination=Pin, Tolerance=10%, Weight=0.03oz, Width=9.53mm
R29 R30: library part CMP-2001-03811-2, "RES Thick Film, 30Ω, 5%, 0.125W, 200ppm/°C, 0805", Case Code (Imperial)=0805, Case Code (Metric)=2012, Max Operating Temperature=155°C, Min Operating Temperature=-55°C, Package Quantity=5000, Power Rating=125mW, Resistance=30R, Temperature Coefficient=200ppm/°C, Tolerance=5%, Voltage rating=150V, Case/Package=0805, Composition="Thick Film", Contact Plating=Tin, Height=0.45mm, Lead Free="Lead Free", Length=2mm, Number of Pins=2, Packaging="Tape and Reel", Radiation Hardening=No, Termination=SMD/SMT, Voltage Rating (DC)=150V, Weight=0.000194oz, Width=1.25mm
R32: library part CMP-1013-00772-3, "RES Thick Film, 220kΩ, 1%, 0.125W, 100ppm/°C, 0805", Case Code (Imperial)=0805, Case Code (Metric)=2012, Max Operating Temperature=155°C, Max Power Dissipation=125mW, Min Operating Temperature=-55°C, Package Quantity=10, Resistance=220kR, Temperature Coefficient=100ppm/°C, Tolerance=1%, Voltage rating=150V, Case/Package=0805, Composition="Thick Film", Contact Plating=Tin, Depth=1.25mm, Features="Automotive AEC-Q200", Height=0.45mm, Lead Free="Lead Free", Length=2mm, Military Standard=Not, Number of Terminations=2, Packaging="Tape and Reel", Power Rating=125mW, Radiation Hardening=No, Termination=SMD/SMT, Voltage Rating (DC)=150V, Weight=0.000194oz, Width=1.25mm
SD1: library part CMP-2000-05621-1, "Micro SD Connector, Pitch 1.1 mm, 8 Position, Height 1.4 mm, -25 to 85 degC, RoHS, Tape and Reel", Current rating=500mA, Manufacturer=Molex, Package Description="Micro SD Connector, Pitch 1.1 mm, 8 Position, Height 1.4 mm", Voltage rating=10VAC/DC, Brand=Molex, Datasheet URL=http://www.molex.com/pdm_docs/sd/5033981892_sd.pdf, Datasheet Version="Rev. E, 04/2006", Factory Pack Quantity=2400, Manufacturer URL=http://www.molex.com/, Mounting Technology=SurfaceMount, Package Reference=503398-1892, Packaging=Reel, Product Category=MemoryCardConnectors, RoHS=Details, Series=503398
SW1 SW2: library part CMP-08834-000008-1, "SWITCH TACTILE SPST-NO 0.05A 24V", Contact Current Rating=50mA, Contact Resistance=100mR, Max Operating Temperature=70°C, Max Voltage Rating (DC)=24V, Min Operating Temperature=-25°C, Operating Force=1.57N, Package Quantity=1, Ratings=IP67, Actuator Length=0.8mm, Actuator Type=Standard, Contact material=Bronze, Contact Plating=Silver, Current rating=50mA, Depth=9mm, Electrical Life=500000Cycles, Height=3.65mm, Illumination Type=Non-Illuminated, Lead Free="Lead Free", Length=6.6mm, Max Current Rating=50mA, Mechanical Life=500000Cycles, Mount="Surface Mount", Number of Poles=1, Orientation=Straight, Packaging="Tape and Reel", Radiation Hardening=No, REACH SVHC="No SVHC", Switch Function=Off-Mom, Switch Travel=0.25mm, Termination="Gull Wing", Throw Configuration=SPST, Voltage Rating (DC)=24V, Weight=0.010582oz, Width=6mm
U1: library part CMP-0062-01631-4, "800mA Low-Dropout Linear Regulator, 4-pin SOT-223, Pb-Free", Manufacturer="Texas Instruments", PackageTopMarking=XYTT*N05B, PowerWise=N, Code_IPC=SOT223-4, Code_JEDEC=TO-261-AA, ComponentLink1Description="Datasheet URL", ComponentLink1URL=http://www.ti.com/general/docs/lit/getliterature.tsp?genericPartNumber=LM1117-N&fileType=pdf, CompType="LDO IC", High-Reliability=Y, PackageDescription="Molded SOT-223, 6.50 x 3.56 x 1.6mm Body, 4 Lead, 2.3mm Pitch", PackageReference=DCY0004A, PartNumber=LM1117IMP-3.3/NOPB, PinCount=4, RoHS=Y
U2: library part CMP-0062-01635-4, "800mA Low-Dropout Linear Regulator, 4-pin SOT-223, Pb-Free", Manufacturer="Texas Instruments", PackageTopMarking=XYTT*N06A, PowerWise=N, Code_IPC=SOT223-4, Code_JEDEC=TO-261-AA, ComponentLink1Description="Datasheet URL", ComponentLink1URL=http://www.ti.com/general/docs/lit/getliterature.tsp?genericPartNumber=LM1117-N&fileType=pdf, CompType="LDO IC", High-Reliability=Y, PackageDescription="Molded SOT-223, 6.50 x 3.56 x 1.6mm Body, 4 Lead, 2.3mm Pitch", PackageReference=DCY0004A, PartNumber=LM1117MPX-5.0/NOPB, PinCount=4, RoHS=Y
U3: library part CMP-06313-000048-1, "IC EEPROM 32K I2C 1MHZ 8SOIC", Case/Package=SOIC, Frequency=1MHz, Max Operating Temperature=85°C, Min Operating Temperature=-40°C, Access Time=550ns, Memory Size=32Kb, Memory Type=Non-Volatile, Mount="Surface Mount", Number of Pins=8, Packaging="Tape and Reel"
U4: library part CMP-0254-00375-2, "IC RTC CLK/CALENDAR I2C 16-SOIC", Case/Package=SOIC, Max Operating Temperature=85°C, Max Supply Voltage=5.5V, Min Operating Temperature=-40°C, Min Supply Voltage=2.3V, Operating Supply Voltage=3.3V, Package Quantity=1000, Contact Plating=Tin, Date Format=YY-MM-DD-dd, Interface=I2C, Lead Free="Lead Free", Logic Function=Clock, Mount="Surface Mount", Number of Pins=16, Packaging="Tape and Reel", Radiation Hardening=No, Time Format=HH:MM:SS
U5: library part CMP-0137-00155-2, "IC GATE DRVR LOW-SIDE 8SOIC", Case/Package=SOIC, Max Operating Temperature=125°C, Max Output Current=4.5A, Max Power Dissipation=610mW, Max Supply Current=2mA, Max Supply Voltage=18V, Min Operating Temperature=-40°C, Min Supply Voltage=4.5V, Nominal Supply Current=1mA, Package Quantity=3300, Fall Time=21ns, Lead Free="Lead Free", Mount="Surface Mount", Number of Drivers=2, Number of Outputs=2, Number of Pins=8, Packaging="Tape and Reel", Power Dissipation=610mW, Propagation Delay=48ns, Radiation Hardening=No, Rise Time=21ns, Turn-On Delay Time=48ns

## Free pads (board coordinates)
  round 4 hole 3.5 unplated: 1(3,3) 1(3,77) 1(60,40) 1(117,3) 1(117,77)

## Nets (pads, with @x,y where several pads share a name; then routed paths per layer and width w, separated by ;. In a path a pad name is that pad's centre, name@x,y a point inside that pad or via, vN(x,y) a via of type N, cw(c..) or ccw(c..) an arc to the next point about the centre after c; other vN are vias at no path point)
+3.3V: C1.1 C6.2 C7.1 C8.2 C9.1 C13.1 C14.1 C15.1 C16.2 C17.2 D2.2 MD1.2 P4.2 P4.4 P8.2 P8.4 R3.1 R4.1 R5.1 R6.1 R7.1 R8.1 R9.1 R10.1 R11.1 R12.1 R14.2 R21.2 SD1.4 U1.2 U1.4 U3.8 U4.2
+5V: C4.1 C5.2 D2.1 D3.2 J2.2 P11.2 U1.3 U2.2 U2.4
+12V: C2.2 C3.1 D3.1 D4.1 F1.2 J1.2 P1.1 P2.1 P3.1 P6.2 P7.2 P9.2 P10.2 R1.1 R2.1 R19.1 R32.2 U2.3 U5.6
GND: BT1.2 C1.2 C2.1 C3.2 C4.2 C5.1 C6.1 C7.2 C9.2 C10.1 C11.1 C12.1 C13.2 C14.2 C15.2 C16.1 C17.1 D1.1 D4.2 J1.1 J2.1 J2.7 J2.9 MD1.1 MD1.15 MD1.38 MD1.39 P4.1 P4.3 P5.2 P6.1 P7.1 P8.1 P8.3 P9.1 P10.1 P11.1 Q1.2 Q2.3 Q3.3 Q4.3 Q5.3 R16.1 R18.1 R20.1 R22.1 R23.1 R24.1 R26.1 R27.2 R28.1 SD1.6 SD1.11 SD1.12 SD1.13 SD1.14 SW1.3 SW1.4 SW2.3 SW2.4 U1.1 U2.1 U3.4 U3.7 U4.5 U4.6 U4.7 U4.8 U4.9 U4.10 U4.11 U4.12 U4.13 U5.1 U5.3 U5.8
NetBT1_1: BT1.1 U4.14
NetC8_1: C8.1 Q2.2
NetC10_2: C10.2 J2.6 MD1.25 R14.1 SW1.1 SW1.2
NetC11_2: C11.2 J1.6 MD1.3 R21.1 SW2.1 SW2.2
NetC12_2: C12.2 Q2.1 R32.1
NetD1_2: D1.2 R1.2
NetF1_1: F1.1 P5.1
NetJ1_3: J1.3 MD1.6
NetJ1_4: J1.4 MD1.11 R6.2
NetJ1_5: J1.5 MD1.13
NetJ1_7: J1.7 J1.8 MD1.33 R7.2 U3.5 U4.15
NetJ1_9: J1.9 J1.10 MD1.36 R8.2 U3.6 U4.16
NetJ1_11: J1.11 MD1.12 R22.2
NetJ1_12: J1.12 MD1.8 R20.2
NetJ2_3: J2.3 MD1.20
NetJ2_4: J2.4 MD1.35
NetJ2_5: J2.5 MD1.34
NetJ2_8: J2.8 MD1.23
NetJ2_10: J2.10 R13.2
NetJ2_11: J2.11 R15.2
NetJ2_12: J2.12 R17.2
NetLS1_1: LS1.1 Q1.3 R19.3
NetLS1_2: LS1.2 R19.2
NetMD1_7: MD1.7 R2.2 R28.2
NetMD1_9: MD1.9 R25.1
NetMD1_10: MD1.10 U5.2
NetMD1_14: MD1.14 R26.2 R31.2
NetMD1_16: MD1.16 R16.2 R33.2
NetMD1_24: MD1.24 R9.2 SD1.2
NetMD1_26: MD1.26 U5.4
NetMD1_27: MD1.27 R17.1 R18.2
NetMD1_28: MD1.28 R15.1
NetMD1_29: MD1.29 R13.1
NetMD1_30: MD1.30 R11.2 R23.2 SD1.5
NetMD1_31: MD1.31 R12.2 R24.2 SD1.7
NetMD1_37: MD1.37 R10.2 SD1.3
NetP1_2: P1.2 Q5.2 R31.1
NetP2_2: P2.2 Q4.2 R33.1
NetP3_2: P3.2 Q3.2
NetQ1_1: Q1.1 R25.2 R27.1
NetQ3_1: Q3.1 R30.1
NetQ4_1: Q4.1 Q5.1 R29.1
NetR3_2: R3.2 U3.1
NetR4_2: R4.2 U3.2
NetR5_2: R5.2 U3.3
NetR29_2: R29.2 U5.5
NetR30_2: R30.2 U5.7
pads on no net: MD1.4 MD1.5 MD1.17 MD1.18 MD1.19 MD1.21 MD1.22 MD1.32 SD1.1 SD1.8 SD1.9 SD1.10 U4.1 U4.3 U4.4

## Keep-outs
Keep-Out Layer:
  lines w0.254: 120,29.718 120,29.733 ; 120,50.25 120,50.277
  lines w0.8: 118.723,49 115.04,49 112.45,46.41 112.45,33.473 114.923,31 118.733,31
  lines w1: 118.733,31 120,29.733 ; 118.75,49 120,50.25 ; 120,29.718 120,0 0,0 0,80 66.523,80 67.494,79 78.194,79 79.172,80 120,80 120,50.277

## Silkscreen, mask and mechanical layers (free items; w line width, h text height)
Top Overlay:
  text "B1" at 110.303,70.164 h1.52 r90
  text "B2" at 112.865,70.011 h1.52 r90
  text "GND" at 40.295,69.049 h1.52 r90
  text "GND" at 45.379,69.049 h1.52 r90
  text "GND" at 52.233,69.034 h1.52 r90
  text "GND" at 57.317,69.049 h1.52 r90
  text "RST" at 97.522,68.986 h1.52 r90
  text "SCL" at 105.209,68.946 h1.52 r90
  text "SCL" at 107.771,68.946 h1.52 r90
  text "VAC" at 89.872,68.777 h1.52 r90
  text "SDA" at 100.085,68.76 h1.52 r90
  text "SDA" at 102.647,68.76 h1.52 r90
  text "GND" at 84.78,68.688 h1.52 r90
  text "+12V" at 87.311,68.418 h1.52 r90
  text "+3.3V" at 42.83,68.399 h1.52 r90
  text "+3.3V" at 47.915,68.399 h1.52 r90
  text "+3.3V" at 54.768,68.399 h1.52 r90
  text "+3.3V" at 59.853,68.399 h1.52 r90
  text "MAG1" at 94.96,67.965 h1.52 r90
  text "TERM" at 92.398,67.852 h1.52 r90
  text "GND" at 46.301,65.369 h1.52
  text "GND" at 53.794,65.369 h1.52
  text "+12V" at 42.364,65.351 h1.52
  text "+12V" at 49.857,65.351 h1.52
  text "+12V" at 9.325,56.258 h1.52 r90
  text "RESET" at 119.249,54.314 h1.52 r90
  text "GND" at 6.767,46.431 h1.52 r90
  text "LAMPADA" at 16.338,42.234 h1.52 r90
  text "GND" at 6.767,34.049 h1.52 r90
  text "PELTIER" at 16.51,30.179 h1.52 r90
  text "+12V" at 6.785,30.103 h1.52 r90
  text "BOOT" at 119.249,22.347 h1.52 r90
  text "GND" at 89.608,22.062 h1.52
  text "GND" at 97.101,22.062 h1.52
  text "+12V" at 93.164,22.044 h1.52
  text "+12V" at 100.657,22.044 h1.52
  text "GND" at 6.767,21.666 h1.52 r90
  text "PELTIER" at 16.51,17.796 h1.52 r90
  text "+12V" at 6.785,17.721 h1.52 r90
  text "GND" at 77.76,8.328 h1.52 r90
  text "+5V" at 80.303,8.328 h1.52 r90
  text "LED R" at 84.128,8.328 h1.52 r90
  text "LED G" at 86.653,8.328 h1.52 r90
  text "LED B" at 89.214,8.328 h1.52 r90
  text "GND" at 91.739,8.328 h1.52 r90
  text "MAG2" at 94.283,8.328 h1.52 r90
  text "GND" at 96.826,8.328 h1.52 r90
  text "BOOT" at 99.369,8.328 h1.52 r90
  text "RX" at 101.908,8.328 h1.52 r90
  text "TX" at 104.51,8.328 h1.52 r90
  text "CLK" at 107.055,8.328 h1.52 r90
  text "+5V" at 109.615,8.328 h1.52 r90
  text "GND" at 112.177,8.328 h1.52 r90
  text "GND" at 39.519,1.615 h1.52
  text "+12V" at 43.456,1.597 h1.52
Bottom Overlay:
  drawing of 9 lines, arcs and shapes, not listed
  text "Refrigerador De Vacinas     Rev. V1.0       25/12/2022" at 7.95,70.79 h3 r90

## Dimensions
120,0 to 120,80 on Mechanical 1
0,0 to 120,0 on Mechanical 1